# EAGLE board LCD_Shield (EAGLE 9.4.0)

Size 99.48 x 74.04 mm. Coordinates in mm from the lower left corner, seen from the top.
Outline: 70.19,0 arc90 99.48,29.68 99.48,44 arc90 71.2,74.04 61,74.04 61,64.04 21,64.04 21,74.04 12.85,74.04
Outline: 13,74.04 arc90 0,61.04 0,13.04 arc90 12,0.04 20,0.04 20,10.04 60,10.04 60,0.04 70.2,0.04
Copper layers (1*16): Top 0.035mm / dielectric 1.5mm / Bottom 0.035mm
Design rules "default": minimum track width 6mil, minimum drill 0.35mm, track to track 6mil, track to pad 6mil, pad to pad 6mil, via to via 6mil, smd to smd 6mil, copper to edge 40mil, drill to drill 6mil, minimum pad ring 10mil, minimum via ring 8mil, stop-mask expansion 4mil, vias tented up to drill 0mil, thermal gap 10mil

## Footprints (pad centres in the part's own frame; a part is rotated, then mirrored left to right if it is on the bottom)
1X08 = drill 1.016 long: 1 -8.89,0; 2 -6.35,0; 3 -3.81,0; 4 -1.27,0; 5 1.27,0; 6 3.81,0; 7 6.35,0; 8 8.89,0

## Placement (x,y rotation side)
BUS1  [1X08]  71.12,5.12 0 top
BUS2  [1X08]  72.39,68.62 0 top

## Library data of the parts
BUS1 BUS2 = pinhead